# Altium PCB PCB_Платы-для-диплома_2_2026-06-06.pcbdoc
Units mm, origin at the board's own origin, x right, y up, seen from the top; angles counter-clockwise.
Board outline 123.32 x 86.74 mm, 2 copper layers (Top Layer, Bottom Layer); 19 components, 16 nets, 100 pads, 0 vias.
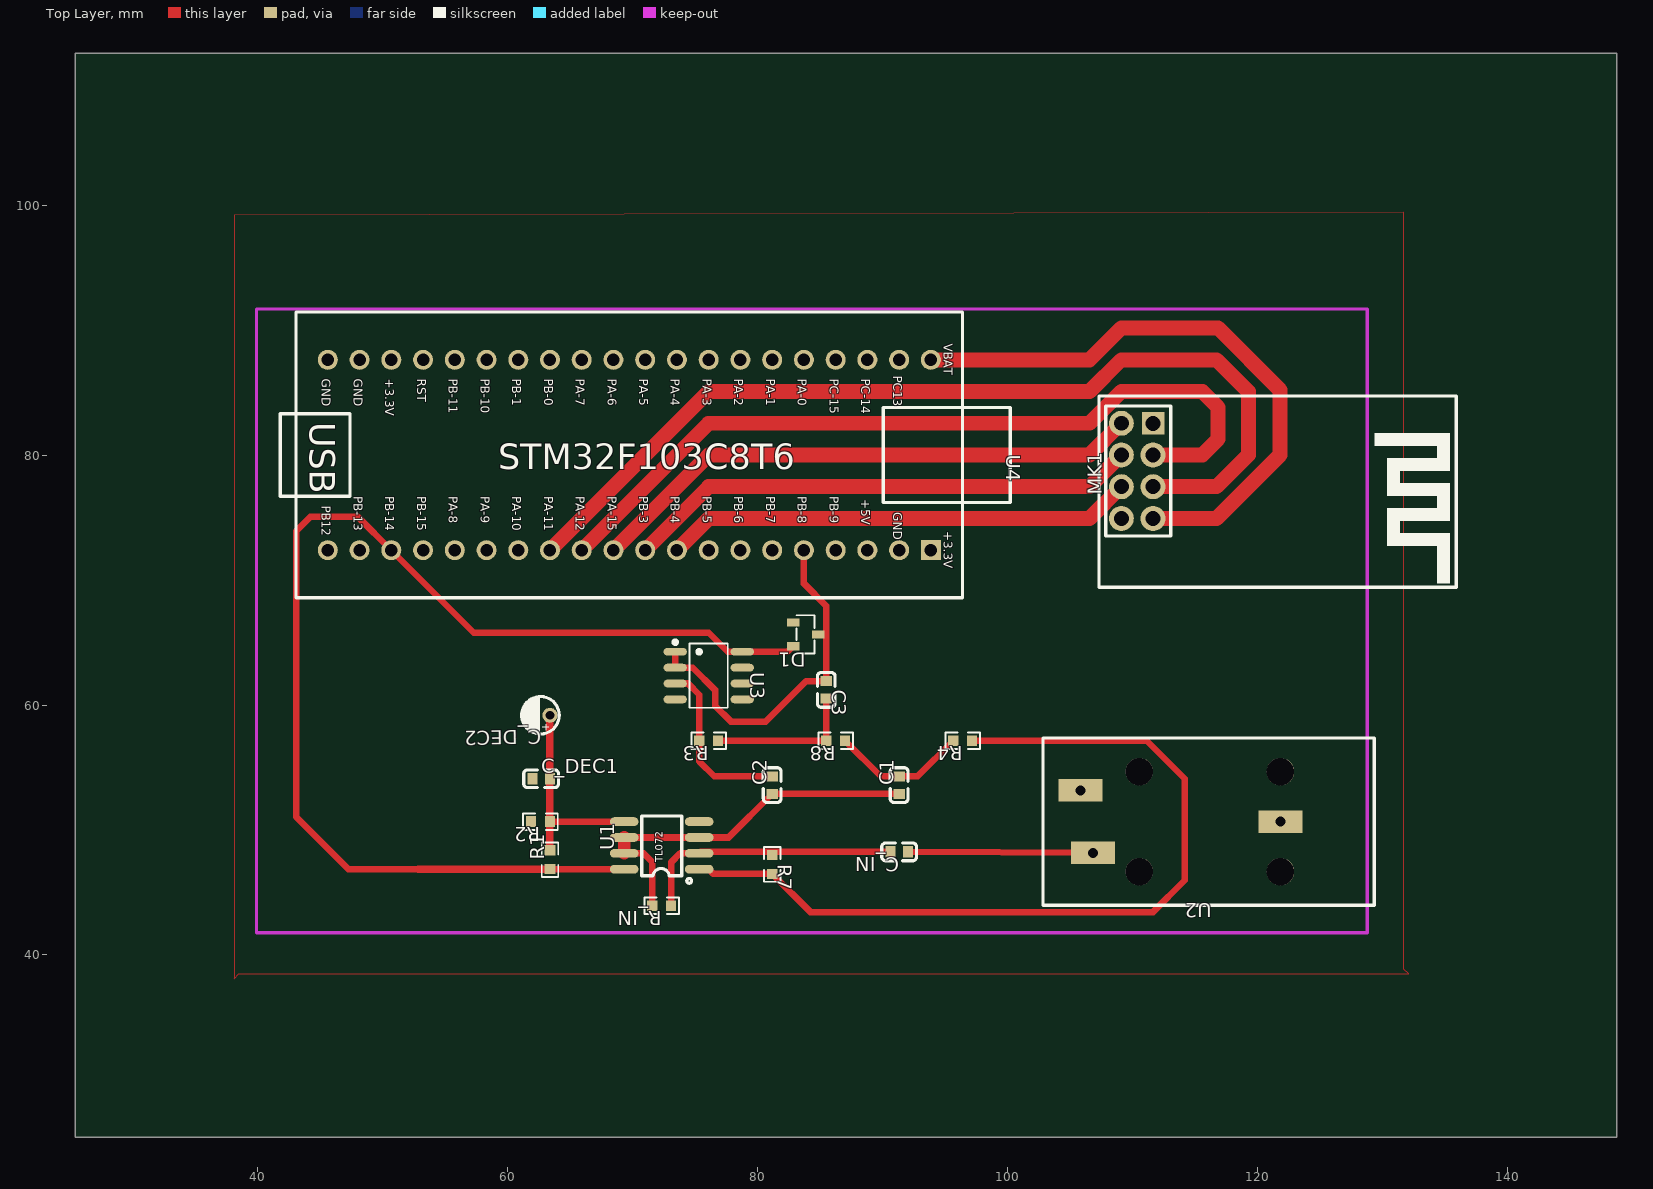
[diagram p0: Top Layer view]
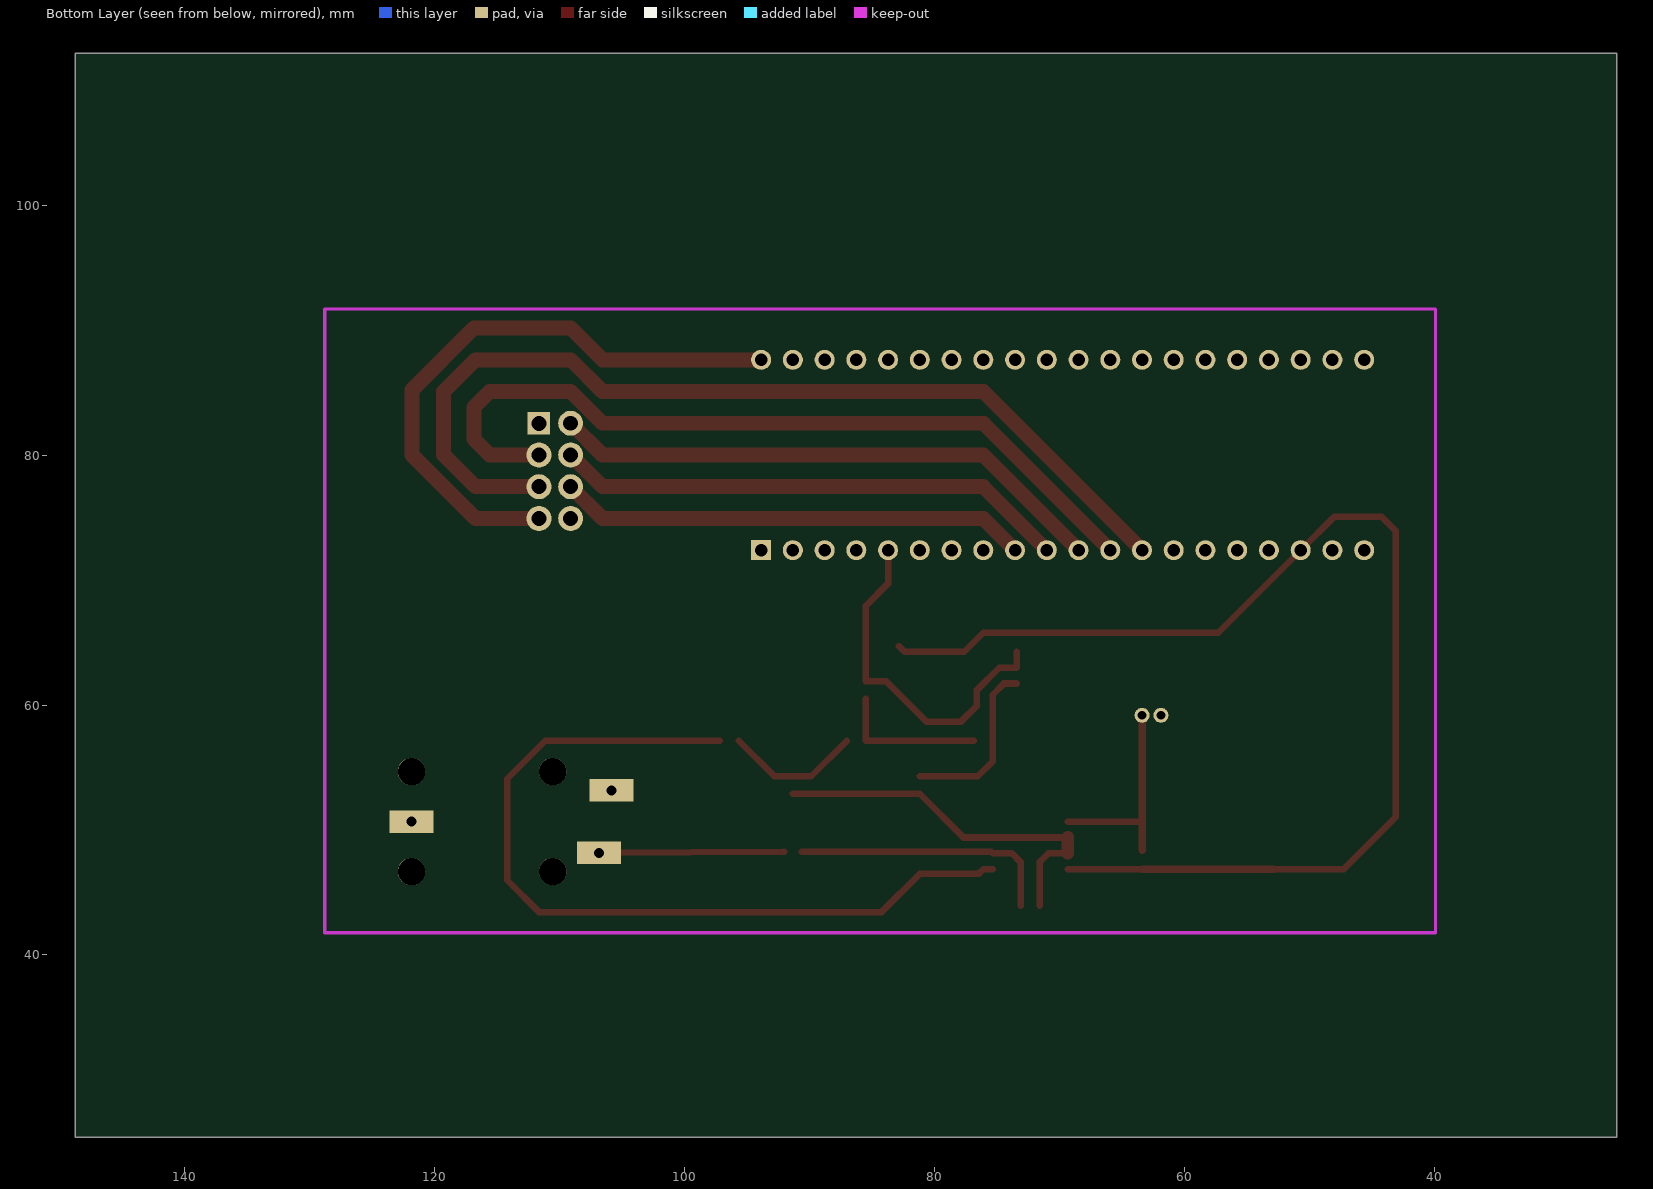
[diagram p1: Bottom Layer view, seen from below]

## Layer stack, top to bottom
Top Layer: signal copper (thickness not stored)
Dielectric: dielectric 0.32, FR-4, Dk 4.8
Bottom Layer: signal copper (thickness not stored)

## Board outline
148.72,25.4 25.4,25.4 25.4,112.141 148.72,112.141

## Components (designator, comment, footprint, x,y, rotation, side; value= is the part's Value field where it differs from the comment)
C1 "2.4nf" C0603 91.313,53.594 r90 top
C2 "68.15pf" C0603 81.153,53.594 r90 top
C3 "18nf" C0603 85.48,61.214 r270 top
C_DEC1 "0.1u" C0603 62.664,54.102 r0 top
C_DEC2 "10u" CAP-D3.0×F1.5 62.613,59.182 r180 top
C_IN "1u" C0603 91.313,48.251 r180 top
D1 "BAT54S-MS" SOT-23-3_L2.9-W1.3-P1.90-LS2.4-BR 83.82,65.659 r180 top
MK1 "2.4GHz" WIRELM-SMD_L28.6-W15.3-P2.54_NRF24L01 110.363,78.74 r90 top
R1 "10k" R0603 63.373,47.625 r90 top
R2 "10k" R0603 62.611,50.673 r180 top
R3 "10k" R0603 76.073,57.15 r180 top
R4 "10k" R0603 96.393,57.15 r180 top
R7 "47k" R0603 81.153,47.244 r270 top
R8 "10k" R0603 86.233,57.15 r180 top
R_IN "1M" R0603 72.311,43.942 r180 top
U1 "TL072" TL072 72.771,49.403 r90 top
U2 "ST-008S-05(REVERSED)" ST-008S-05(REVERSED) 116.078,50.673 r180 top
U3 "LMV358IDR-P" SOP-8_L4.9-W3.9-P1.27-LS6.0-BL 76.073,62.357 r270 top
U4 "Blue_Pill" "STM32F103C8T6-BLUEPILL 1" 70.993,80.01 r270 top

## Footprints (in the part's own frame and the unit in brackets; to place one, negate y for a bottom-side part, rotate by r counter-clockwise, add the part's x,y. Pads: shape width x height; smd on the part's side, far side on the other; paste and mask are expansions set on the pad)
C0603 [mm]
  rect 0.8x0.9 smd paste+0 mask+0.051: 1(-0.7,0) 2(0.7,0)
  silkscreen extent -1.39,-0.71 1.39,0.71
CAP-D3.0×F1.5 [mm]
  round 1.2 hole 0.7 paste+0 mask+0.102: 1(-0.751,0) 2(0.751,0)
  silkscreen extent -1.5,-1.5 1.5,1.5
R0603 [mm]
  rect 0.806x0.864 smd paste-100 mask+0.051: 1(-0.753,0) 2(0.753,0)
  silkscreen extent -1.39,-0.66 1.39,0.66
SOP-8_L4.9-W3.9-P1.27-LS6.0-BL [mm]
  oval 0.63x1.865 smd paste+0 mask+0.051: 1(-1.905,-2.682) 2(-0.635,-2.682) 3(0.635,-2.682) 4(1.905,-2.682) 5(1.905,2.683) 6(0.635,2.683) 7(-0.635,2.683) 8(-1.905,2.683)
  silkscreen extent -2.82,-2.83 2.58,1.52
SOT-23-3_L2.9-W1.3-P1.90-LS2.4-BR [mm]
  rect 1x0.65 smd paste+0 mask+0.051: 1(1,-0.95) 2(1,0.95) 3(-1,0)
  silkscreen extent -0.73,-1.53 0.73,1.53
ST-008S-05(REVERSED) [mm]
  rect 3.5x1.8 hole 0.8 paste+0 mask+0.051: 2(-5.75,0) 3(9.25,2.5) 4(10.25,-2.5)
  round 2.2 hole 2.2 unplated paste+0: ""(-5.75,4) ""(-5.75,-4) ""(5.55,4) ""(5.55,-4)
  silkscreen extent -13.25,-6.7 13.25,6.7
"STM32F103C8T6-BLUEPILL 1" [mm]
  round 1.6 hole 1 paste+0 mask+0.102: 1(-7.62,22.86) 2(-7.62,20.32) 3(-7.62,17.78) 4(-7.62,15.24) 5(-7.62,12.7) 6(-7.62,10.16) 7(-7.62,7.62) 8(-7.62,5.08) 9(-7.62,2.54) 10(-7.62,0) 11(-7.62,-2.54) 12(-7.62,-5.08) 13(-7.62,-7.62) 14(-7.62,-10.16) 15(-7.62,-12.7) 16(-7.62,-15.24) 17(-7.62,-17.78) 18(-7.62,-20.32) 19(-7.62,-22.86) 20(-7.62,-25.4) 21(7.62,-25.4) 22(7.62,-22.86) 23(7.62,-20.32) 24(7.62,-17.78) 25(7.62,-15.24) 26(7.62,-12.7) 27(7.62,-10.16) 28(7.62,-7.62) 29(7.62,-5.08) 30(7.62,-2.54) 31(7.62,0) 32(7.62,2.54) 33(7.62,5.08) 34(7.62,7.62) 35(7.62,10.16) 36(7.62,12.7) 37(7.62,15.24) 38(7.62,17.78) 39(7.62,20.32)
  rect 1.6x1.6 hole 1 paste+0 mask+0.102: 40(7.62,22.86)
  silkscreen extent -11.43,-29.21 11.43,29.21
TL072 [mil]
  oval 27.56x90 smd paste+0 mask+4: 1(-100,-100) 2(-50,-100) 3(0,-100) 4(50,-100) 5(50,136.22) 6(0,136.22) 7(-50,136.22) 8(-100,136.22)
  silkscreen extent -144,-76 68,81
WIRELM-SMD_L28.6-W15.3-P2.54_NRF24L01 [mm]
  rect 1.8x1.8 hole 1.2 paste+0 mask+0.051: 1(3.807,-1.27)
  round 2 hole 1.2 paste+0 mask+0.051: 2(3.81,1.27) 3(1.27,-1.27) 4(1.27,1.27) 5(-1.27,-1.27) 6(-1.27,1.27) 7(-3.81,-1.27) 8(-3.81,1.27)
  silkscreen extent -9.31,-25.53 5.99,3.07

## Nets (pads, with @x,y where several pads share a name; then routed paths per layer and width w, separated by ;. In a path a pad name is that pad's centre, name@x,y a point inside that pad or via, vN(x,y) a via of type N, cw(c..) or ccw(c..) an arc to the next point about the centre after c; other vN are vias at no path point)
ADC_IN0: C3.1 D1.3 U3.1 U3.2 U4.36 | length 28.5
  Top Layer w0.525: U3.1 U3.2 74.803,62.992 76.581,61.214 76.581,59.944 77.851,58.674 80.642,58.674 83.881,61.915 C3.1 ; U4.36 83.693,69.723 85.48,67.936 C3.1
C1_2: C1.2 R4.2 R8.1 | length 11
  Top Layer w0.525: R8.1 89.842,54.294 C1.2 92.784,54.294 R4.2
C_DEC1_2: C_DEC1.2 C_DEC2.1 R1.2 R2.1 U1.5 | length 16.8
  Top Layer w0.525: R2.1 U1.5
  Top Layer w0.6: C_DEC1.2 R2.1 ; C_DEC1.2 C_DEC2.1 ; R1.2 R2.1@63.373,50.673
GND: C_DEC1.1 C_DEC2.2 D1.1 MK1.8 R2.2 U1.4 U2.2 U3.4 U4.2 U4.21 U4.22
IN: C_IN.1 U2.3 | length 14.8
  Top Layer w0.525: C_IN.1 U2.3
LFF: R4.1 R7.2 U1.1 | length 67.8
  Top Layer w0.525: U1.1 76.082,46.863 76.454,46.491 R7.2 ; R7.2 84.209,43.434 111.633,43.434 114.173,45.974 114.173,54.102 111.125,57.15 R4.1
MK1_2: MK1.2 U4.30 | length 44.8
  Top Layer w1.2: U4.30 76.073,80.01 106.553,80.01 MK1.2
MK1_3: MK1.3 U4.29 | length 65
  Top Layer w1.2: U4.29 76.073,82.55 106.553,82.55 109.093,85.09 115.57,85.09 116.84,83.82 116.84,81.28 115.57,80.01 MK1.3
MK1_4: MK1.4 U4.31 | length 41.3
  Top Layer w1.2: U4.31 76.073,77.47 106.553,77.47 MK1.4
MK1_5: MK1.5 U4.28 | length 77
  Top Layer w1.2: U4.28 76.073,85.09 106.553,85.09 109.093,87.63 116.713,87.63 119.253,85.09 119.253,80.01 116.713,77.47 MK1.5
MK1_6: MK1.6 U4.32 | length 37.7
  Top Layer w1.2: U4.32 76.073,74.93 106.553,74.93 MK1.6
R8_2: C3.2 R3.1 R8.2 | length 12
  Top Layer w0.525: R3.1 R8.2 C3.2
U1_2: C_IN.2 R7.1 R_IN.1 U1.2 | length 21.4
  Top Layer w0.525: R_IN.1 73.064,47.41 73.787,48.133 U1.2 75.429,48.251 R7.1@81.153,48.251 ; R7.1@81.153,48.252 C_IN.2
U3_3: C2.2 R3.2 U3.3 | length 14
  Top Layer w0.525: U3.3 74.422,61.722 75.32,60.824 75.32,56.134 ; 75.319,56.134 75.319,55.491 76.515,54.295 C2.2
V_REF: C1.1 C2.1 R_IN.2 U1.3 U1.6 U1.7 | length 30.8
  Top Layer w0.525: U1.7 70.866,48.133 71.558,47.441 R_IN.2 ; U1.6 U1.3 77.662,49.403 C2.1 C1.1
  Top Layer w1: U1.7 U1.6
VCC: D1.2 MK1.7 R1.1 U1.8 U3.8 U4.1 U4.23 | length 144.3
  Top Layer w0.525: 52.824,46.871 47.236,46.871 43.053,51.054 43.053,73.914 44.196,75.057 48.006,75.057 U4.23 57.277,65.786 76.073,65.786 77.597,64.262 U3.8 82.373,64.262 D1.2 ; R1.1 U1.8
  Top Layer w0.6: 52.823,46.872 R1.1
  Top Layer w1.2: U4.1 106.553,87.63 109.093,90.17 116.84,90.17 121.793,85.217 121.793,80.01 116.713,74.93 MK1.7
pads on no net: MK1.1 U2. U2.4 U3.5 U3.6 U3.7 U4.3 U4.4 U4.5 U4.6 U4.7 U4.8 U4.9 U4.10 U4.11 U4.12 U4.13 U4.14 U4.15 U4.16 U4.17 U4.18 U4.19 U4.20 U4.24 U4.25 U4.26 U4.27 U4.33 U4.34 U4.35 U4.37 U4.38 U4.39 U4.40

## Polygon pours and split planes (outlines as drawn)
GND on Top Layer (solid): 38.1,99.187 38.1,38.1 38.481,38.481 132.08,38.481 131.699,38.862 131.699,99.441

## Text inside footprints (layer, text, board x,y; h text height)
U4: Top Overlay "VBAT" at 94.9,88.9 h0.7 r270; Top Overlay "PC13" at 90.836,86.36 h0.7 r270; Top Overlay "PC-14" at 88.296,86.106 h0.7 r270; Top Overlay "PC-15" at 85.756,86.106 h0.7 r270; Top Overlay "PA-0" at 83.216,86.106 h0.7 r270; Top Overlay "PA-1" at 80.676,86.106 h0.7 r270; Top Overlay "PA-2" at 78.136,86.106 h0.7 r270; Top Overlay "PA-3" at 75.596,86.106 h0.7 r270; Top Overlay "PA-4" at 73.056,86.106 h0.7 r270; Top Overlay "PA-5" at 70.516,86.106 h0.7 r270; Top Overlay "PA-6" at 67.976,86.106 h0.7 r270; Top Overlay "PA-7" at 65.436,86.106 h0.7 r270; Top Overlay "PB-0" at 62.896,86.106 h0.7 r270; Top Overlay "PB-1" at 60.356,86.106 h0.7 r270; Top Overlay "PB-10" at 57.816,86.106 h0.7 r270; Top Overlay "PB-11" at 55.276,86.106 h0.7 r270; Top Overlay "RST" at 52.736,86.106 h0.7 r270; Top Overlay "+3.3V" at 50.196,86.106 h0.7 r270; Top Overlay "GND" at 47.656,86.106 h0.7 r270; Top Overlay "GND" at 45.116,86.106 h0.7 r270; Top Overlay "+3.3V" at 94.9,73.914 h0.7 r270; Top Overlay "GND" at 90.836,75.438 h0.7 r270; Top Overlay "+5V" at 88.296,76.454 h0.7 r270; Top Overlay "PB-9" at 85.756,76.708 h0.7 r270; Top Overlay "PB-8" at 83.216,76.708 h0.7 r270; Top Overlay "PB-7" at 80.676,76.708 h0.7 r270; Top Overlay "PB-6" at 78.136,76.708 h0.7 r270; Top Overlay "PB-5" at 75.596,76.708 h0.7 r270; Top Overlay "PB-4" at 73.056,76.708 h0.7 r270; Top Overlay "PB-3" at 70.516,76.708 h0.7 r270; Top Overlay "PA-15" at 67.976,76.708 h0.7 r270; Top Overlay "PA-12" at 65.436,76.708 h0.7 r270; Top Overlay "PA-11" at 62.896,76.708 h0.7 r270; Top Overlay "PA-10" at 60.356,76.708 h0.7 r270; Top Overlay "PA-9" at 57.816,76.708 h0.7 r270; Top Overlay "PA-8" at 55.276,76.708 h0.7 r270; Top Overlay "PB-15" at 52.736,76.708 h0.7 r270; Top Overlay "PB-14" at 50.196,76.708 h0.7 r270; Top Overlay "PB-13" at 47.656,76.708 h0.7 r270; Top Overlay "PB12" at 45.116,75.946 h0.7 r270; Top Overlay "STM32F103C8T6" at 59.233,78.867 h2.03; Top Overlay "USB" at 44.13,82.626 h2.03 r270